# EAGLE board ESP32LiPoUSB (EAGLE 9.3.2)
REV: C
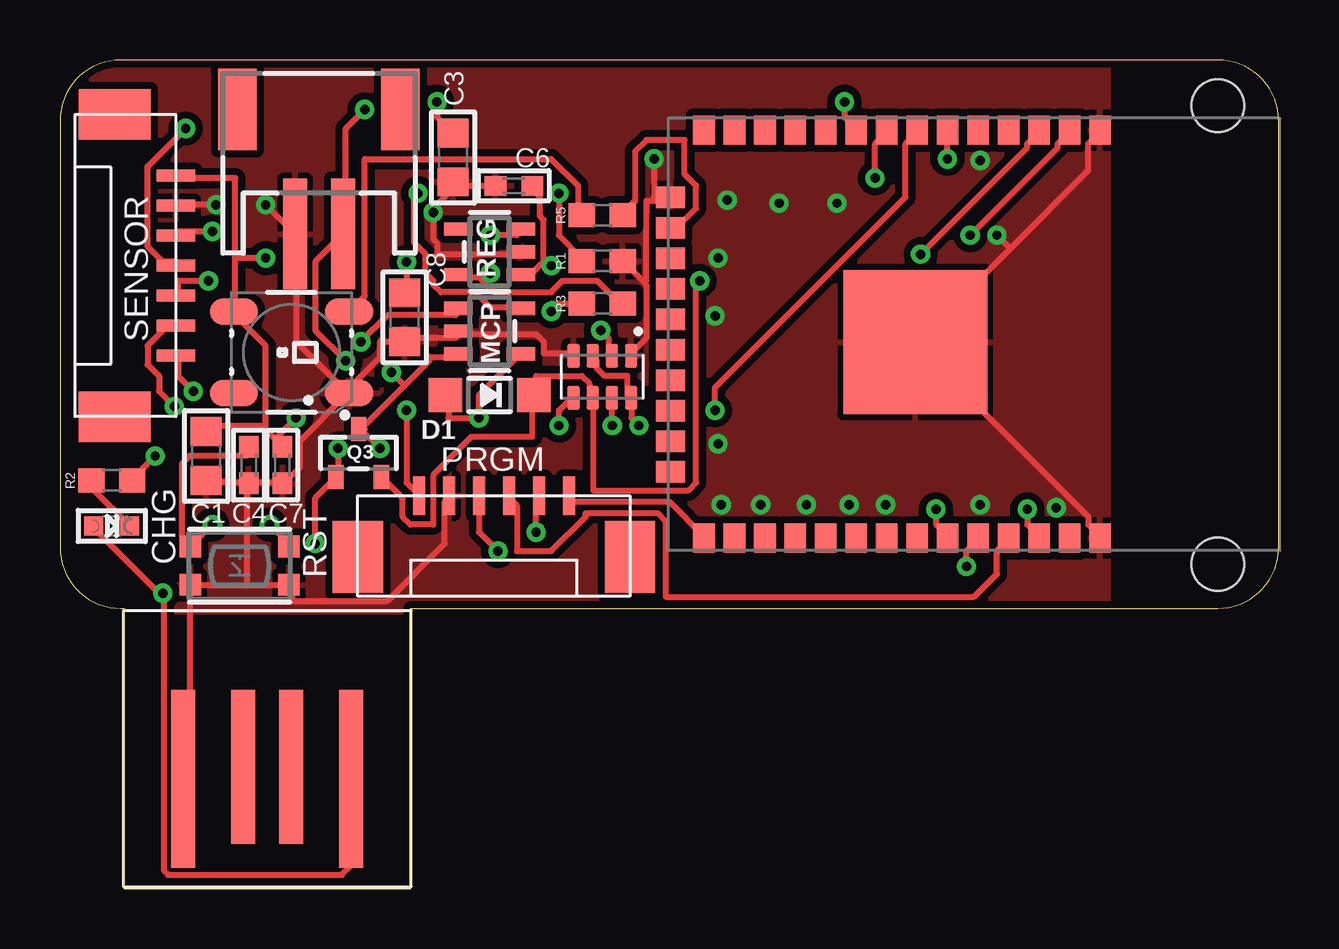
[diagram p0: board, top side]
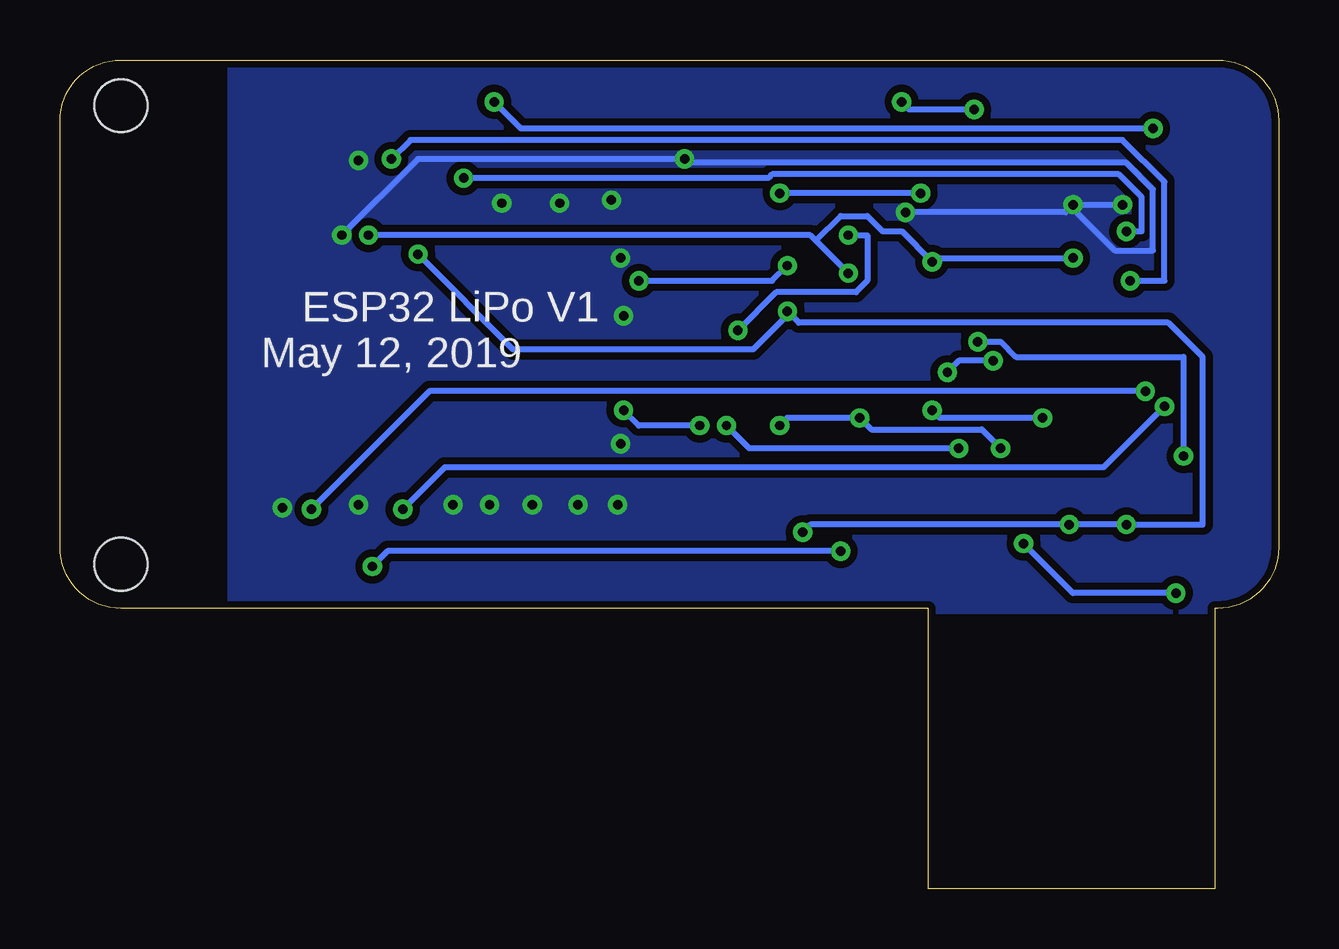
[diagram p1: board, bottom side, seen from below]

Size 50.8 x 34.54 mm. Coordinates in mm from the lower left corner, seen from the top.
Outline: 48.26,11.68 arc90 50.8,14.22 50.8,32 arc90 48.26,34.54 2.54,34.54 arc90 0,32 0,14.22 arc90 2.54,11.68 2.67,11.68 2.67,0 14.61,0 14.61,11.68 48.26,11.68
Copper layers (1*16): Top 0.035mm / dielectric 1.5mm / Bottom 0.035mm
Design rules "adafruit 7-7 *": minimum track width 10mil, minimum drill 15.5mil, track to track 8mil, track to pad 7mil, pad to pad 7mil, via to via 7mil, smd to smd 7mil, copper to edge 10mil, drill to drill 8mil, minimum pad ring 10mil, minimum via ring 8mil, stop-mask expansion 2mil, vias tented up to drill 20mil, thermal gap 10mil
Holes 2.2 mm at 48.26,13.53 48.26,32.64

## Footprints (pad centres in the part's own frame; a part is rotated, then mirrored left to right if it is on the bottom)
CAP_0805 = smd 1.2 x 1.3: 1 -1.016,0; 2 1.016,0
CAP_0603 = smd 0.9 x 0.8: 1 -0.762,0; 2 0.762,0
MICROBUILDER_CHIPLED_0603 = smd 0.8 x 0.8: A 0,-0.75; C 0,0.75
SOD-123 = smd 1.4 x 1.4: A 1.85,0; C -1.85,0
SOT23-5 = smd 0.55 x 1.2: 1 -0.95,-1.3; 2 0,-1.3; 3 0.95,-1.3; 4 0.95,1.3; 5 -0.95,1.3
JST1.25_6P = smd 0.5 x 1.6: 1 0,0; 2 1.25,0; 3 2.5,0; 4 3.75,0; 5 5,0; 6 6.25,0 | smd 2.1 x 3: 7 -2.55,2.55; 8 8.8,2.55
SOT23-R = smd 0.635 x 1.016: 1 -0.95,-1; 2 0.95,-1; 3 0,1
0603 = smd 1.1 x 1: 1 -0.85,0; 2 0.85,0
RESCAF80P320X160X60-8N = smd 0.97 x 0.53: 1 -0.875,1.2; 2 -0.875,0.4; 3 -0.875,-0.4; 4 -0.875,-1.2; 5 0.875,-1.2; 6 0.875,-0.4; 7 0.875,0.4; 8 0.875,1.2
LED-TRICOLOR-5050-IC = smd 2 x 1.1: DIN -2.4,-1.7; DOUT 2.4,1.7; VDD 2.4,-1.7; VSS -2.4,1.7
JST1.25_7P = smd 0.5 x 1.6: 1 0,0; 2 1.25,0; 3 2.5,0; 4 3.75,0; 5 5,0; 6 6.25,0; 7 7.5,0 | smd 2.1 x 3: 8 -2.55,2.55; 9 10.05,2.55
BTN_KMR2_4.6X2.8 = smd 0.9 x 0.9: A 2.05,0.8; A' -2.05,0.8; B 2.05,-0.8; B' -2.05,-0.8
USB_ON_BOARD = smd 6.41 x 1: D+ 0,1; D- 0,-1 | smd 7.41 x 1: GND -0.5,3.5; VCC -0.5,-3.5
JSTPH2 = smd 1 x 4.6: 1 -1,-3.7; 2 1,-3.7 | smd 1.6 x 3.4: NC1 -3.4,1.5; NC2 3.4,1.5
WROOM32_SKINNY = smd 1.2 x 0.9: 1 -8.5,5; 2 -8.5,3.73; 3 -8.5,2.46; 4 -8.5,1.19; 5 -8.5,-0.08; 6 -8.5,-1.35; 7 -8.5,-2.62; 8 -8.5,-3.89; 9 -8.5,-5.16; 10 -8.5,-6.43; 11 -8.5,-7.7; 12 -8.5,-8.97; 13 -8.5,-10.24; 14 -8.5,-11.51; 25 8.5,-11.51; 26 8.5,-10.24; 27 8.5,-8.97; 28 8.5,-7.7; 29 8.5,-6.43; 30 8.5,-5.16; 31 8.5,-3.89; 32 8.5,-2.62; 33 8.5,-1.35; 34 8.5,-0.08; 35 8.5,1.19; 36 8.5,2.46; 37 8.5,3.73; 38 8.5,5 | smd 0.9 x 1.2: 15 -5.7,-12.9; 16 -4.43,-12.9; 17 -3.16,-12.9; 18 -1.89,-12.9; 19 -0.62,-12.9; 20 0.65,-12.9; 21 1.92,-12.9; 22 3.19,-12.9; 23 4.46,-12.9; 24 5.73,-12.9 | smd 6 x 6: P$1 0.34,-2.7

## Placement (x,y rotation side)
C1  10uF  [CAP_0805]  6.1,18.03 270 top
C3  10µF  [CAP_0805]  16.38,30.48 270 top
C4  1uF  [CAP_0603]  7.87,17.65 270 top
C6  10µF  [CAP_0603]  18.92,29.3 180 top
C7  1uF  [CAP_0603]  9.27,17.65 270 top
C8  10µF  [CAP_0805]  14.37,23.82 270 top
CHG  ORANGE  [MICROBUILDER_CHIPLED_0603]  2.16,15.11 270 top
D1  MBR120  [SOD-123]  17.91,20.57 180 top
MCP  MCP73831  [SOT23-5]  17.91,23.24 270 top
PRGM  JST_1.25_6P  [JST1.25_6P]  21.21,16.38 180 top
Q3  DMG3415U  [SOT23-R]  12.45,18.16 0 top
R1  4.7K  [0603]  22.61,26.16 0 top
R2  1K  [0603]  2.16,17.02 0 top
R3  10K  [0603]  22.61,24.38 0 top
R5  330  [0603]  22.61,28.07 0 top
RA1  100K  [RESCAF80P320X160X60-8N]  22.61,21.34 270 top
REG  AP2112-3.3  [SOT23-5]  17.91,26.54 90 top
RGB  LED_WS2812  [LED-TRICOLOR-5050-IC]  9.65,22.35 180 top
SENSOR  JST_1.25_7P  [JST1.25_7P]  4.83,22.23 90 top
SW2  KMR2  [BTN_KMR2_4.6X2.8]  7.49,13.46 180 top
U$12  USB_ON_BOARD  [USB_ON_BOARD]  8.64,5.08 90 top
X1  JSTPH  [JSTPH2]  10.79,30.99 0 top
X2  ESP32_WROOM32_SKINNY  [WROOM32_SKINNY]  38.35,23.11 270 top

## Library data of the parts
C1 C3 C4 C6 C7 CHG R1-R3 R5 RA1 = Scott-Electrical
C8 = Scott-Electrical; COMPANY: ADAFRUIT INDUSTRIES; DRAWN: KTOWN; REV: A
D1 MCP Q3 REG SW2 X1 X2 = microbuilder
PRGM SENSOR U$12 = Scott-Connectors
RGB = Scott-ICs

## Nets
3.3V: C1.1 C7.1 C8.1 PRGM.6 R3.2 REG.5 RGB.VDD SENSOR.7 X2.2
A2_I34: SENSOR.3 X2.6
A3_I39: X2.5
A4_IO36: X2.4
A13_I35: RA1.3 RA1.8 X2.7
EN: RA1.2 REG.3
GND: C1.2 C3.2 C4.2 C6.2 C7.2 C8.2 MCP.2 PRGM.5 R1.2 RA1.1 RA1.4 REG.2 RGB.VSS SENSOR.6 SW2.A SW2.A' U$12.GND X1.1 X2.1 X2.15 X2.38 X2.P$1
GPIO0: PRGM.1 X2.25
GPIO2: X2.24
IO13_A12: R5.2 X2.16
IO21_SDA: SENSOR.2 X2.33
IO22_SCL: SENSOR.1 X2.36
IO32_A7: SENSOR.5 X2.8
IO33_A9: SENSOR.4 X2.9
N$1: CHG.C R2.1
N$2: R5.1 RGB.DIN
N$3: MCP.1 R2.2
N$4: MCP.5 R1.1
N$7: C6.1 D1.C Q3.2 RA1.6 REG.1
RESET: C4.1 PRGM.2 R3.1 SW2.B SW2.B' X2.3
RXD0: PRGM.4 X2.34
TXD0: PRGM.3 X2.35
VBAT: C3.1 MCP.3 Q3.3 RA1.7 X1.2
VBUS: CHG.A D1.A MCP.4 Q3.1 RA1.5 U$12.VCC

## Tracks (layer width: path | path; a pad name or v marks a point on that pad's centre or on a via)
3.3V  (via drill 0.39)
  Top 0.254: 7.3,26.29 7.3,24.07 RGB.VDD 7.3,23.91 8.57,22.64 8.57,19.3 8.49,19.23 | 7.3,26.29 7.3,29.62 4.92,29.62 SENSOR.7 | 8.49,19.23 8.41,19.3 6.19,19.3 6.19,19.14 C1.1 | 8.49,19.23 9.21,18.51 C7.1 9.05,18.83 v9.84,19.62 | v14.45,19.94 14.45,16.92 14.92,16.45 PRGM.6 | 17.7,25.26 17.46,25.49 16.67,25.49 REG.5 | 17.7,25.26 18.1,24.86 20.48,24.86 20.95,25.34 22.38,25.34 23.34,24.38 R3.2 | v37.94,27.24 41.59,30.89 41.59,31.05 42.07,31.53 X2.2 | v17.94,25.65 17.78,25.49 17.78,25.34 17.7,25.26 | v14.45,26.13 14.45,24.86 C8.1 | v8.57,26.29 7.3,26.29
  Bottom 0.254: v14.45,19.94 14.13,19.62 v9.84,19.62 | v37.94,27.24 19.53,27.24 19.29,27 | v17.94,25.65 19.29,27 | 19.29,27 18.26,28.03 17.14,28.03 16.51,27.4 15.72,27.4 v14.45,26.13 14.45,26.29 v8.57,26.29
A2_I34  (via drill 0.39)
  Top 0.254: v36.99,30.42 36.99,31.53 X2.6 | v6.19,25.34 4.92,25.34 4.92,24.86 SENSOR.3
  Bottom 0.254: v36.99,30.42 36.2,31.21 6.51,31.21 4.76,29.46 4.76,25.34 v6.19,25.34
A13_I35  (via drill 0.39)
  Top 0.254: RA1.3 22.23,22.16 22.38,22 22.38,21.68 22.7,21.37 23.65,21.37 23.65,20.57 RA1.8 23.81,20.41 23.81,19.62 v24.13,19.3 | v27.3,19.94 27.3,20.89 35.24,28.83 35.24,31.05 35.72,31.53 X2.7
  Bottom 0.254: v27.3,19.94 26.67,19.3 v24.13,19.3
EN  (via drill 0.39)
  Top 0.254: v22.54,23.27 22.86,22.95 22.86,22.32 RA1.2 | v17.94,27.24 19.05,27.24 19.05,27.4 REG.3
  Bottom 0.254: v22.54,23.27 20.95,24.86 17.62,24.86 17.14,25.34 17.14,27.24 v17.94,27.24
GND  (via drill 0.39)
  Top 0.254: 7.78,12.64 9.53,12.64 SW2.A' 9.68,12.64 9.68,12 13.65,12 16.03,14.38 16.03,16.13 16.19,16.29 PRGM.5 | 7.78,12.64 5.56,12.64 SW2.A 5.4,12.64 5.4,4.86 5.24,4.7 U$12.GND | RA1.4 21.27,22.32 20.16,22.32 20.16,22.8 19.84,23.11 16.67,23.11 MCP.2 16.51,23.11 16.51,22.95 14.45,22.95 C8.2 14.29,22.8 13.34,22.8 13.34,22.16 12.06,20.89 12.06,20.73 RGB.VSS | C4.2 7.94,16.92 9.21,16.92 C7.2 9.37,16.92 10,17.56 10,18.67 11.91,20.57 RGB.VSS | C1.2 6.19,16.92 7.78,16.92 C4.2 | 7.78,12.64 7.78,16.76 C4.2 | X2.38 43.34,14.7 42.86,15.18 42.86,15.49 35.72,22.64 X2.P$1 35.72,22.8 39.61,26.69 | 39.61,26.69 42.86,29.94 42.86,31.05 43.34,31.53 X2.1 | 24.37,25.26 23.5,26.13 R1.2 | 24.37,25.26 24.45,25.18 24.45,22.95 23.81,22.32 RA1.1 | 24.77,28.67 24.45,28.67 24.45,25.34 24.37,25.26 | 24.77,28.67 25.4,28.67 X2.15 | 16.51,29.3 18.1,29.3 C6.2 | 16.51,29.3 16.51,29.46 C3.2 16.51,29.3 | 16.51,29.3 15.56,28.35 v15.56,28.19 15.56,27.08 15.72,26.92 15.72,26.45 19.05,26.45 REG.2 | v6.51,28.51 4.92,28.51 SENSOR.6 | v8.57,28.51 9.68,27.4 X1.1 9.84,27.24 9.84,22.8 11.91,20.73 RGB.VSS | v24.77,30.42 24.77,28.67 | v39.05,27.24 39.61,26.69
  Bottom 0.254: v8.57,28.51 v6.51,28.51 | v15.56,28.19 8.89,28.19 v8.57,28.51 | v8.57,28.51 8.57,28.35 6.83,26.61 5.24,26.61 5.24,29.15 6.35,30.26 24.61,30.26 v24.77,30.42 35.88,30.42 v39.05,27.24
  other vias: 38.35,30.35 34.42,16 32.89,16 31.11,16 29.21,16 27.56,16 27.43,18.54 27.3,23.88 27.43,26.29 27.81,28.7 29.97,28.57 32.38,28.57 38.35,16 41.53,15.88
  pour Bottom (isolate 0.305): -1.91,37.59 -1.91,11.56 43.69,11.56 43.69,37.59 -1.78,37.59
  pour Top (isolate 0.305): -1.91,37.59 -1.91,11.56 43.69,11.56 43.69,37.59
GPIO0
  Top 0.254: X2.25 26.83,14.7 25.4,16.13 21.27,16.13 21.27,16.29 PRGM.1
IO13_A12
  Top 0.254: R5.2 23.5,28.19 23.97,28.67 23.97,30.73 24.45,31.21 26.04,31.21 26.04,29.78 26.51,29.3 26.51,28.35 25.56,27.4 X2.16
IO21_SDA  (via drill 0.39)
  Top 0.254: v36.51,15.81 36.51,15.18 36.99,14.7 X2.33 | v4.76,20.1 4.13,20.73 4.13,21.37 3.65,21.84 3.65,22.64 4.45,23.43 4.76,23.43 SENSOR.2
  Bottom 0.254: v36.51,15.81 34.77,17.56 7.3,17.56 v4.76,20.1
IO22_SCL  (via drill 0.39)
  Top 0.254: v40.32,15.81 40.32,15.18 40.8,14.7 X2.36 | v5.56,20.73 4.92,21.37 4.92,22.16 SENSOR.1
  Bottom 0.254: v40.32,15.81 35.4,20.73 v5.56,20.73
IO32_A7  (via drill 0.39)
  Top 0.254: v33.97,29.62 33.97,31.05 34.45,31.53 X2.8 | v6.35,27.4 4.92,27.4 4.92,27.24 SENSOR.5
  Bottom 0.254: v33.97,29.62 21.27,29.62 21.11,29.78 6.67,29.78 5.71,28.83 5.71,27.4 v6.35,27.4
IO33_A9  (via drill 0.39)
  Top 0.254: v32.7,32.8 32.7,32.16 33.18,31.69 X2.9 | v5.24,31.69 3.65,30.1 3.65,26.77 4.29,26.13 4.76,26.13 SENSOR.4
  Bottom 0.254: v32.7,32.8 31.59,31.69 v5.24,31.69
N$1
  Top 0.254: CHG.C 2.86,15.18 1.43,16.61 1.43,16.92 R2.1
N$2
  Top 0.254: R5.1 21.75,28.19 21.59,28.35 21.59,29.3 20.48,30.42 12.7,30.42 12.7,24.7 12.06,24.07 RGB.DIN
N$3  (via drill 0.39)
  Top 0.254: v3.97,18.03 3.02,17.08 R2.2 | v12.54,22.8 13.65,23.91 16.51,23.91 16.51,24.07 MCP.1
  Bottom 0.254: v3.97,18.03 3.97,22.16 10.95,22.16 11.59,22.8 v12.54,22.8
N$4  (via drill 0.39)
  Top 0.254: v20.8,28.99 20.8,27.24 21.75,26.29 R1.1 | v14.92,28.99 14.76,28.83 14.76,26.92 15.24,26.45 15.24,25.65 15.56,25.34 15.56,25.18 15.88,24.86 17.3,24.86 17.94,24.23 19.05,24.23 MCP.5
  Bottom 0.254: v14.92,28.99 v20.8,28.99
N$7  (via drill 0.39)
  Top 0.254: 20.08,26.05 19.68,25.65 19.21,25.65 REG.1 | 20.08,26.05 20.16,26.13 20.16,27.88 20,28.03 20,28.83 19.68,29.15 C6.1 | Q3.2 13.49,17.08 14.29,16.29 14.29,15.49 14.61,15.18 15.56,15.18 15.56,17.24 17.14,18.83 19.68,18.83 19.68,20.57 D1.C 19.84,20.57 19.84,21.37 21.75,21.37 22.07,21.05 22.07,20.57 RA1.6 22.23,20.41 22.23,16.61 26.19,16.61 26.51,16.92 26.51,25.18 v26.67,25.34 | v20.48,25.97 20.16,25.97 20.08,26.05
  Bottom 0.254: v20.48,25.97 21.11,25.34 v26.67,25.34
RESET  (via drill 0.39)
  Top 0.254: C4.1 7.78,18.35 7.78,18.03 5.4,18.03 5.08,17.72 5.08,14.7 5.4,14.38 SW2.B 5.56,14.38 v6.35,15.18 | v8.73,15.18 9.53,14.38 SW2.B' | R3.1 20.48,24.38 v20.48,24.07 | v35.88,26.45 40.32,30.89 40.32,31.05 40.8,31.53 X2.3 | v19.84,14.86 19.84,16.29 PRGM.2
  Bottom 0.254: v35.88,26.45 31.91,22.48 21.91,22.48 20.48,23.91 v20.48,24.07 20,23.59 4.6,23.59 3.17,22.16 3.17,15.18 v6.35,15.18 v8.73,15.18 19.53,15.18 v19.84,14.86
RXD0  (via drill 0.39)
  Top 0.254: v37.78,13.43 37.78,14.06 38.26,14.54 X2.34 | v18.26,14.06 17.46,14.86 17.46,16.29 PRGM.4
  Bottom 0.254: v37.78,13.43 37.15,14.06 v18.26,14.06
TXD0
  Top 0.254: X2.35 39.53,14.54 39.05,14.06 39.05,13.11 38.1,12.16 25.24,12.16 25.24,15.33 24.92,15.65 21.91,15.65 21.91,15.49 20.48,14.06 19.05,14.06 19.05,15.97 18.73,16.29 PRGM.3
VBAT  (via drill 0.39)
  Top 0.254: v23.02,19.3 23.02,20.41 RA1.7 | v13.34,18.35 12.54,19.14 Q3.3 12.7,19.14 12.7,19.3 14.37,20.97 | 14.37,20.97 15.4,22 15.4,22.16 16.51,22.16 MCP.3 | C3.1 15.72,32.16 v15.72,32.8 | v12.7,32.48 11.91,31.69 11.91,27.4 X1.2 11.75,27.24 10.64,26.13 10.64,23.27 v11.91,22 | v13.81,21.53 14.37,20.97
  Bottom 0.254: v23.02,19.3 22.07,18.35 v13.34,18.35 | v15.72,32.8 15.4,32.48 v12.7,32.48 | v13.81,21.53 13.34,22 v11.91,22
VBUS  (via drill 0.39)
  Top 0.254: v20.8,19.3 20.8,19.94 21.27,20.41 RA1.5 | D1.A 16.19,20.57 16.19,19.62 v17.46,19.62 17.46,20.57 19.05,22.16 MCP.4 | v11.59,18.35 11.59,17.24 Q3.1 11.43,17.08 10.64,16.29 v10.64,14.38 | CHG.A 1.43,15.02 4.21,12.24 v4.29,12.32 4.33,12.27 4.33,0.75 4.51,0.57 11.75,0.57 12.14,0.96 U$12.VCC
  Bottom 0.254: v20.8,19.3 20.48,19.62 v17.46,19.62 16.99,19.14 12.38,19.14 v11.59,18.35 | v10.64,14.38 8.57,12.32 v4.29,12.32

## Text on the board
tPlace: CHG | RST
bPlace: ESP32 LiPo V1 | May 12, 2019